# Altium PCB TankBack.PcbDoc
Units mm, origin at the board's own origin, x right, y up, seen from the top; angles counter-clockwise.
Board outline 120.2 x 140.2 mm, 2 copper layers (TL, BL), stack 0.872 mm thick; 9 components, 2 nets, 16 pads, 0 vias.
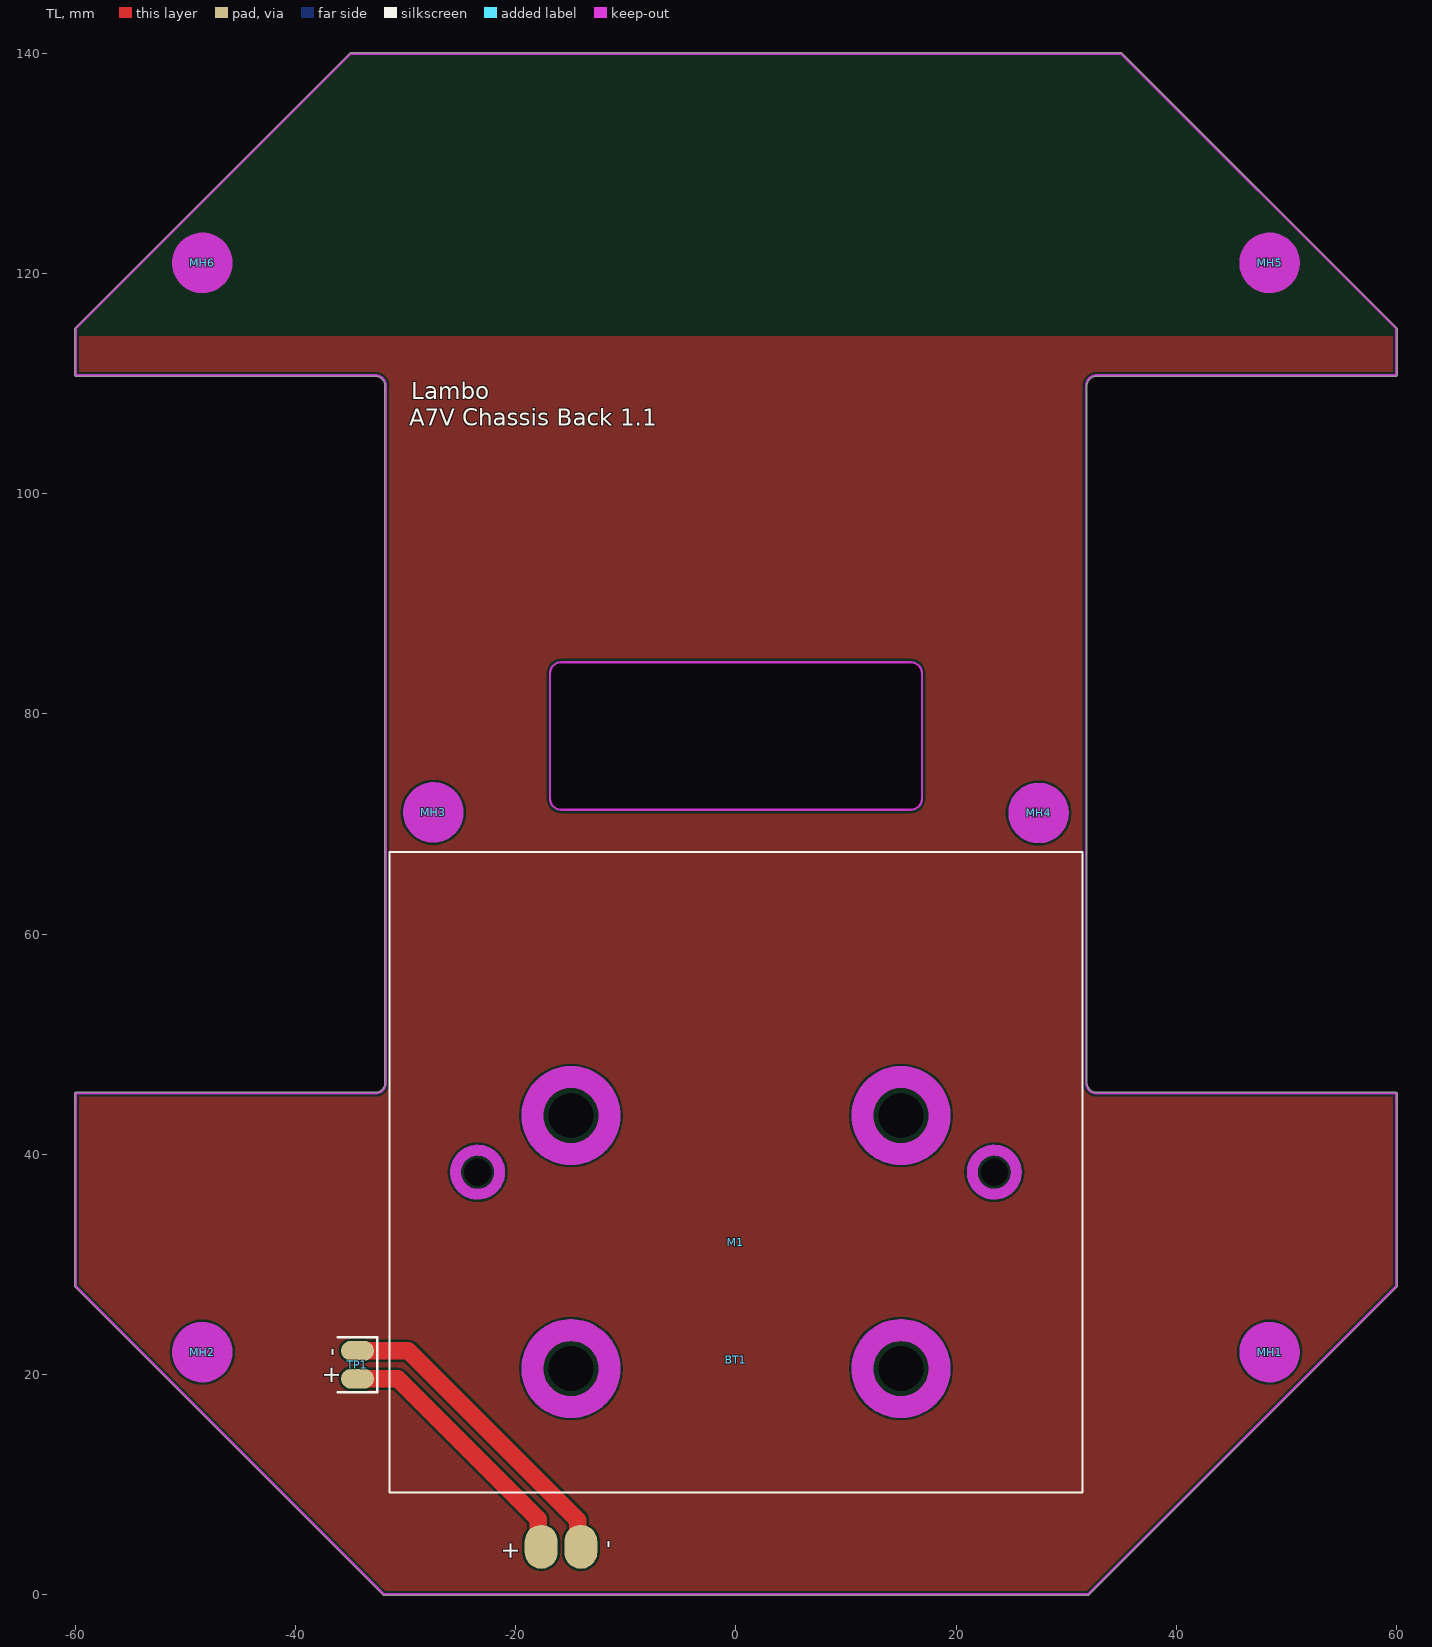
[diagram p0: TL view]
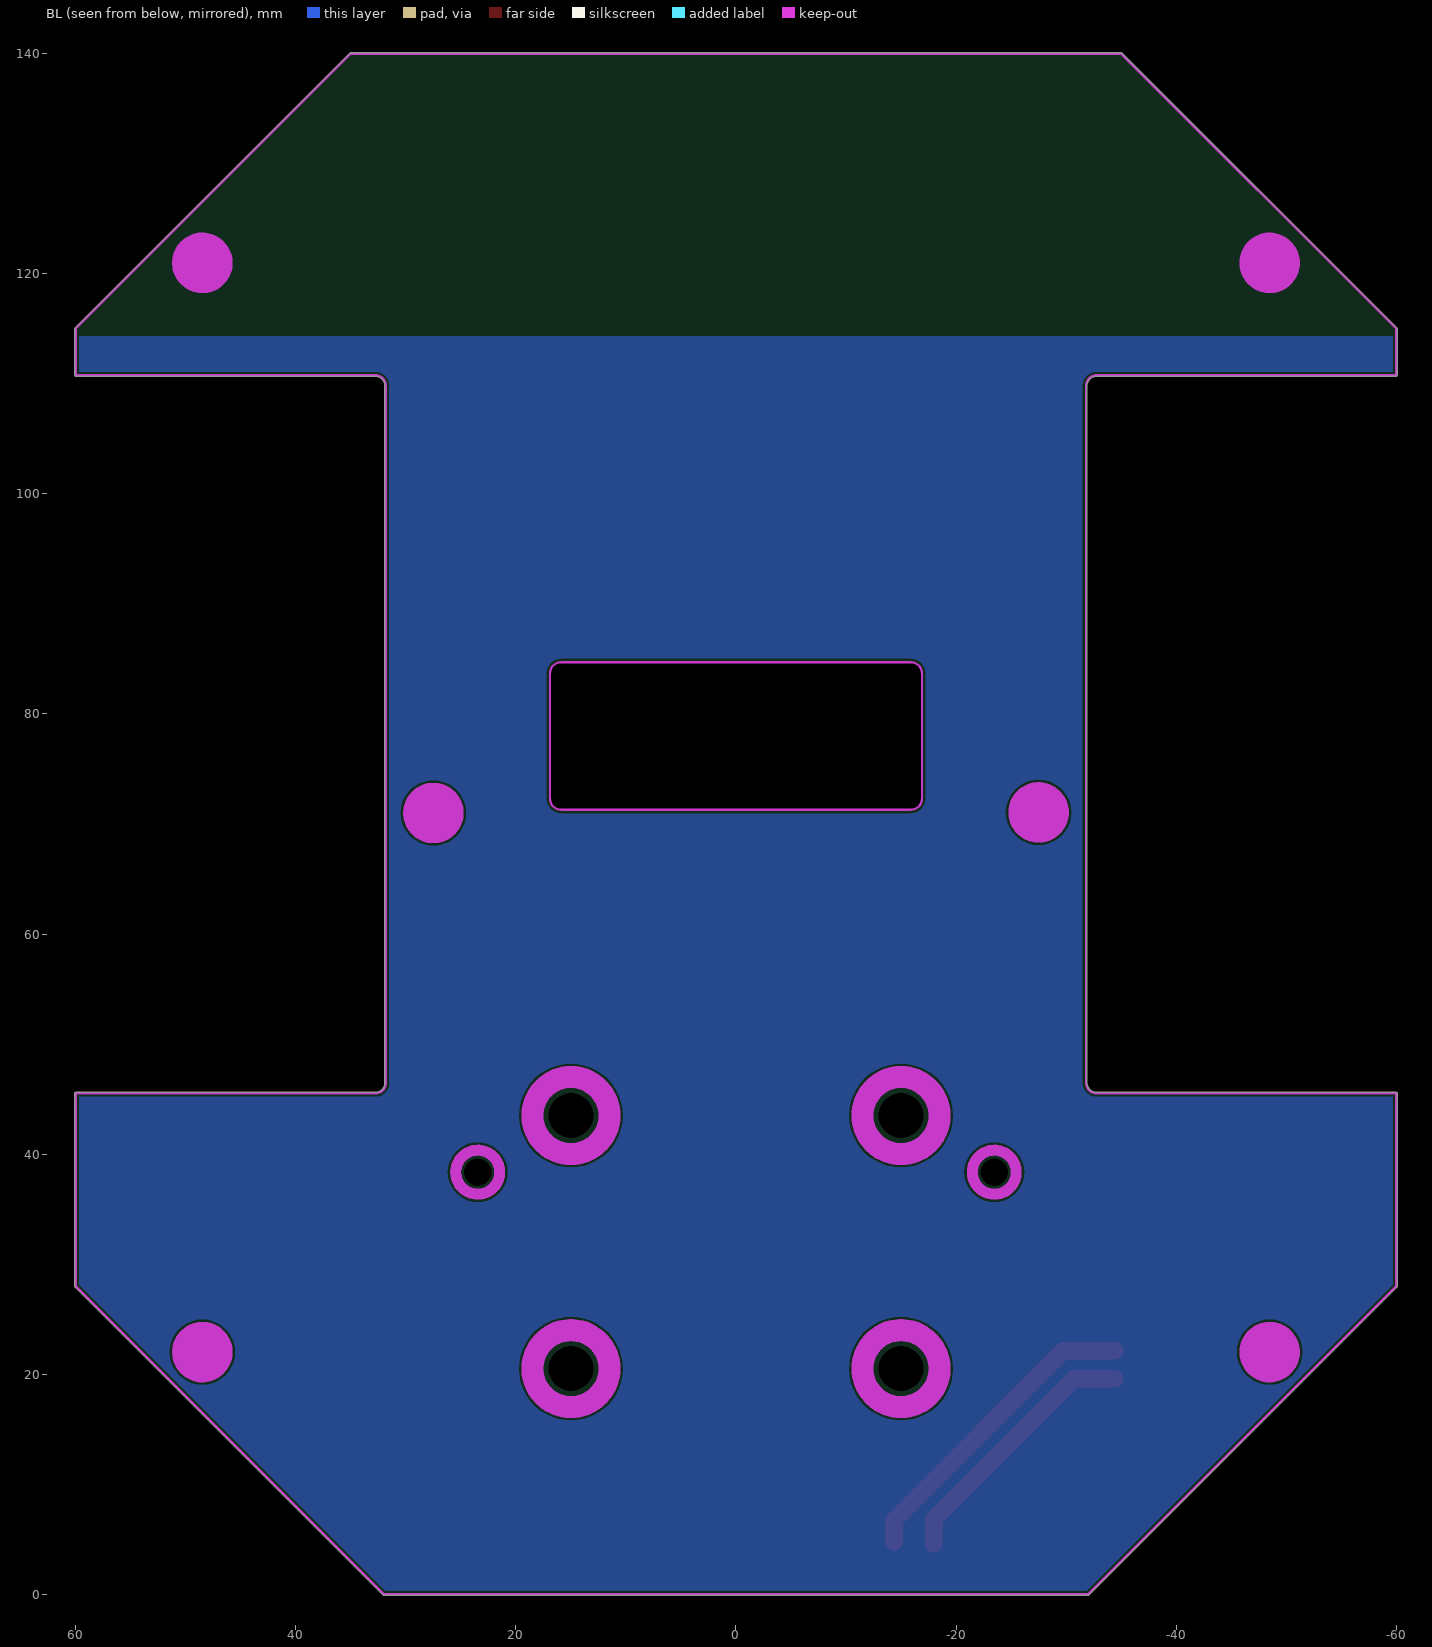
[diagram p1: BL view, seen from below]

## Layer stack, top to bottom
Top Solder: solder mask 0.01, Solder Resist, Dk 3.5
TL: signal copper 0.036
Dielectric 4: prepreg 0.8, FR-4, Dk 4.2
BL: signal copper 0.036
Bottom Solder: solder mask 0.01, Solder Resist, Dk 3.5

## Board outline
-60.071,27.929 cw(c-60,28) -60.1,28 -60.1,45.5 cw(c-60,45.5) -60,45.6 -32.801,45.6 cw(c-32.8,45.5) -32.8,45.6 ccw(c-32.8,46.5) -31.9,46.498 cw(c-31.8,46.5) -31.9,46.5 -31.9,109.799 -31.9,109.8 ccw(c-32.8,109.8) -32.799,110.7 cw(c-32.8,110.8) -32.8,110.7 -60,110.7 cw(c-60,110.8) -60.1,110.8 -60.1,115 cw(c-60,115) -60.071,115.071 -35.071,140.071 cw(c-35,140) -35,140.1 35,140.1 cw(c35,140) 35.071,140.071 60.071,115.071 cw(c60,115) 60.1,115 60.1,110.8 cw(c60,110.8) 60,110.699 32.8,110.699 cw(c32.8,110.8) 32.799,110.699 cw(c32.8,109.8) 32.8,110.699 32.799,110.699 ccw(c32.8,109.8) 31.9,109.8 cw(c31.8,109.8) 31.9,109.799 31.9,46.5 cw(c31.8,46.5) 31.9,46.498 cw(c32.8,46.5) 31.9,46.5 31.9,46.498 ccw(c32.8,46.5) 32.8,45.6 cw(c32.8,45.5) 32.801,45.6 60,45.6 cw(c60,45.5) 60.1,45.5 60.1,28 cw(c60,28) 60.071,27.929 32.071,-0.071 cw(c32,0) 32,-0.1 -32,-0.1 cw(c-32,0) -32.071,-0.071
cut-out: -15.9,84.7 15.9,84.7 cw(c15.9,83.7) 16.9,83.7 16.9,72.3 cw(c15.9,72.3) 15.9,71.3 -15.9,71.3 cw(c-15.9,72.3) -16.9,72.3 -16.9,83.7 cw(c-15.9,83.7)

## Design rules (kind name [scope] priority, off if disabled: settings)
Clearance [All] p1: gap=0.2 ignorepadtopadclearanceinfootprint=TRUE except(0: Arc-Hole Track-Hole SMDPad-Hole THPad-Hole Via-Hole Fill-Hole Poly-Hole Region-Hole Text-Hole)
DiffPairsRouting DiffPairsRouting_1 [InDifferentialPair('D')] p1: maxlimit=0.4 minlimit=0.2 mostfreqgap=0.2 toplayer_minwidth=0.2 toplayer_maxwidth=0.4 toplayer_prefwidth=0.4 bottomlayer_minwidth=0.2 bottomlayer_maxwidth=0.4 bottomlayer_prefwidth=0.4 maxuncoupledlength=12.7
DiffPairsRouting [All] p2: maxlimit=0.254 minlimit=0.254 mostfreqgap=0.254 toplayer_minwidth=0.381 toplayer_maxwidth=0.381 toplayer_prefwidth=0.381 bottomlayer_minwidth=0.381 bottomlayer_maxwidth=0.381 bottomlayer_prefwidth=0.381 maxuncoupledlength=12.7
HoleSize [All] p1: absolutevalues=TRUE maxlimit=10 minlimit=0.3 maxpercent=80.000 minpercent=20.000
MinimumSolderMaskSliver MinimumSolderMaskSliver_1 [HasFootprint('TSQFP50P900X900X160-48N_48LQFP')] p1: minsoldermaskwidth=0.08
MinimumSolderMaskSliver [All] p2: minsoldermaskwidth=0.05
PolygonConnect [All] p1: thpad.connectstyle=Relief thpad.reliefconductorwidth=0.4 thpad.reliefentries=4 thpad.polygonreliefangle="90 Angle" thpad.airgapwidth=0.254 smdpad.connectstyle=Direct smdpad.reliefconductorwidth=0.254 smdpad.reliefentries=4 smdpad.polygonreliefangle="90 Angle" smdpad.airgapwidth=0.254 via.connectstyle=Direct via.reliefconductorwidth=0.254 via.reliefentries=4 via.polygonreliefangle="90 Angle" via.airgapwidth=0.254
RoutingVias [All] p1: holewidth=0.3 width=0.7 viastyle="Through Hole" minholewidth=0.3 minwidth=0.5 maxholewidth=1 maxwidth=2
SilkToSilkClearance [All] p1: silktosilkclearance=0
SilkToSolderMaskClearance [IsPad] p1: minsilkscreentomaskgap=0.1 clearancetoexposedcopper=TRUE
SolderMaskExpansion [All] p1: expansion=0.102 istentingtop=FALSE
Width [All] p1: maxlimit=10 minlimit=0.2 preferedwidth=0.254
25 further rules are at their usual default settings.

## Components (designator, comment, footprint, x,y, rotation, side; value= is the part's Value field where it differs from the comment)
BT1 "BatteryHolder4xAA" BATTERY_HOLDER_4AA 0,38.35 r270 top
M1 "CasterWheel" CASTER_WHEEL 0,32 r180 top
MH1 "2.5mm Non-Plated Hole" MTG250X550 48.5,22 r0 top
MH2 "2.5mm Non-Plated Hole" MTG250X550 -48.5,22 r0 top
MH3 "2.5mm Non-Plated Hole" MTG250X550 -27.5,71.05 r0 top
MH4 "2.5mm Non-Plated Hole" MTG250X550 27.5,71 r0 top
MH5 "2.5mm Non-Plated Hole" MTG250X550 48.5,121 r0 top
MH6 "2.5mm Non-Plated Hole" MTG250X550 -48.5,121 r0 top
TP1 "Pads-N2" PADS-N2 -34.4,20.85 r0 top

## Footprints (in the part's own frame and the unit in brackets; to place one, negate y for a bottom-side part, rotate by r counter-clockwise, add the part's x,y. Pads: shape width x height; smd on the part's side, far side on the other; paste and mask are expansions set on the pad)
BATTERY_HOLDER_4AA [mm]
  oval 4x3 smd: 1(34.05,-17.7) 2(34.05,-14.1)
  round 2 hole 2.5: 3(0,23.475) 4(0,-23.475)
  Keep-Out Layer circle w1: c0,-23.475 r2
  Keep-Out Layer circle w1: c0,23.475 r2
  silkscreen extent -29.1,-31.5 29.1,31.5, body extent -29,-31.5 38,31.5, height 16
CASTER_WHEEL [mm]
  round 0 hole 4.1 unplated: 8(-15,-11.5) 8(-15,11.5) 8(15,-11.5) 8(15,11.5)
  Keep-Out Layer circle w2: c15,11.5 r3.5
  Keep-Out Layer circle w2: c15,-11.5 r3.5
  Keep-Out Layer circle w2: c-15,11.5 r3.5
  Keep-Out Layer circle w2: c-15,-11.5 r3.5
MTG250X550 [mm]
  round 0 hole 2.5 unplated: ""(0,0)
  TL keep-out circle w2.75: c0,0 r1.375
  BL keep-out circle w2.75: c0,0 r1.375
PADS-N2 [mm]
  oval 3x1.8 smd paste-2: 1(0,1.27) 2(0,-1.27)
  silkscreen extent -1.8,-2.5 1.8,2.5

## Part data
MH1 MH2 MH3 MH4 MH5 MH6: library part NONPART-007, BWA PN=NONPART-007, Display_Name="2.5mm Non-Plated Hole", Schematic Symbol=HOLE_UNPLATED

## Nets (pads, with @x,y where several pads share a name; then routed paths per layer and width w, separated by ;. In a path a pad name is that pad's centre, name@x,y a point inside that pad or via, vN(x,y) a via of type N, cw(c..) or ccw(c..) an arc to the next point about the centre after c; other vN are vias at no path point)
NetBT1_1: BT1.1 TP1.2 | length 24
  TL w1.6: TP1.2 -30.73,19.58 -17.968,6.818 BT1.1@-17.968,4.568
NetBT1_2: BT1.2 TP1.1 | length 28.4
  TL w1.6: TP1.1 -29.77,22.12 -14.368,6.718 BT1.2@-14.368,4.768
pads on no net: BT1.3 BT1.4 M1.8 MH1. MH2. MH3. MH4. MH5. MH6.

## Polygon pours and split planes (outlines as drawn)
no net on TL "NONET_L01_P016" (solid, pour order 16): -60,45.5 -32.4,45.5 -31.8,46.1 -31.8,110.201 -32.399,110.8 -60,110.8 -60,114.35 60,114.35 60,110.8 32.399,110.8 31.8,110.201 31.8,46.1 32.401,45.5 60,45.5 60,28 32,0 -32,0 -60,28
no net on BL "NONET_L02_P025" (solid, pour order 25): -60,45.5 -32.4,45.5 -31.8,46.1 -31.8,110.201 -32.399,110.8 -60,110.8 -60,114.35 60,114.35 60,110.8 32.399,110.8 31.8,110.201 31.8,46.1 32.401,45.5 60,45.5 60,28 32,0 -32,0 -60,28

## Keep-outs
Keep-Out Layer:
  lines w0.2: -60,28 -60,45.5 -32.8,45.5 ccw(c-32.8,46.5) -31.8,46.5 -31.8,109.8 ccw(c-32.8,109.8) -32.8,110.8 -60,110.8 -60,115 -35,140 35,140 60,115 60,110.8 32.8,110.8 ccw(c32.8,109.8) 31.8,109.8 31.8,46.5 ccw(c32.8,46.5) 32.8,45.5 60,45.5 60,28 32,0 -32,0 -60,28 ; -16.9,72.3 ccw(c-15.9,72.3) -15.9,71.3 15.9,71.3 ccw(c15.9,72.3) 16.9,72.3 16.9,83.7 ccw(c15.9,83.7) 15.9,84.7 -15.9,84.7 ccw(c-15.9,83.7) -16.9,83.7 -16.9,72.3

## Silkscreen, mask and mechanical layers (free items; w line width, h text height)
Top Overlay:
  text "Lambo" at -29.496,108.604 h1.52
  text "A7V Chassis Back 1.1" at -29.696,106.212 h1.52
Mechanical 20:
  lines w2: -15.9,72.3 15.9,72.3 15.9,83.7 -15.9,83.7 -15.9,72.3
  text "CUTOUT" at -14.096,80.354 h1.52
MechOutline (Mech31):
  lines w0.2: -60,28 -60,45.5 -32.8,45.5 ccw(c-32.8,46.5) -31.8,46.5 -31.8,109.8 ccw(c-32.8,109.8) -32.8,110.8 -60,110.8 -60,115 -35,140 0,140 35,140 60,115 60,110.8 32.8,110.8 ccw(c32.8,109.8) 31.8,109.8 31.8,46.5 ccw(c32.8,46.5) 32.8,45.5 60,45.5 60,28 32,0 0,0 -32,0 -60,28 ; -16.9,72.3 ccw(c-15.9,72.3) -15.9,71.3 15.9,71.3 ccw(c15.9,72.3) 16.9,72.3 16.9,83.7 ccw(c15.9,83.7) 15.9,84.7 -15.9,84.7 ccw(c-15.9,83.7) -16.9,83.7 -16.9,72.3

## Text inside footprints (layer, text, board x,y; h text height)
BT1: Top Overlay "+" at -21.15,4.796 h1.52 r270; Top Overlay "-" at -12.158,4.896 h1.52 r270
TP1: Top Overlay "+" at -36.05,19.054 h1.52 r90; Top Overlay "-" at -36.042,21.604 h1.52 r90